# Altium PCB Soldeerstation_PCB.PcbDoc (part 2 of 2)
Units mil, origin at the board's own origin, x right, y up, seen from the top; angles counter-clockwise.
Board outline 2015.02 x 3477.09 mil, 2 copper layers (Top Layer, Bottom Layer); 67 components, 39 nets, 214 pads, 115 vias.
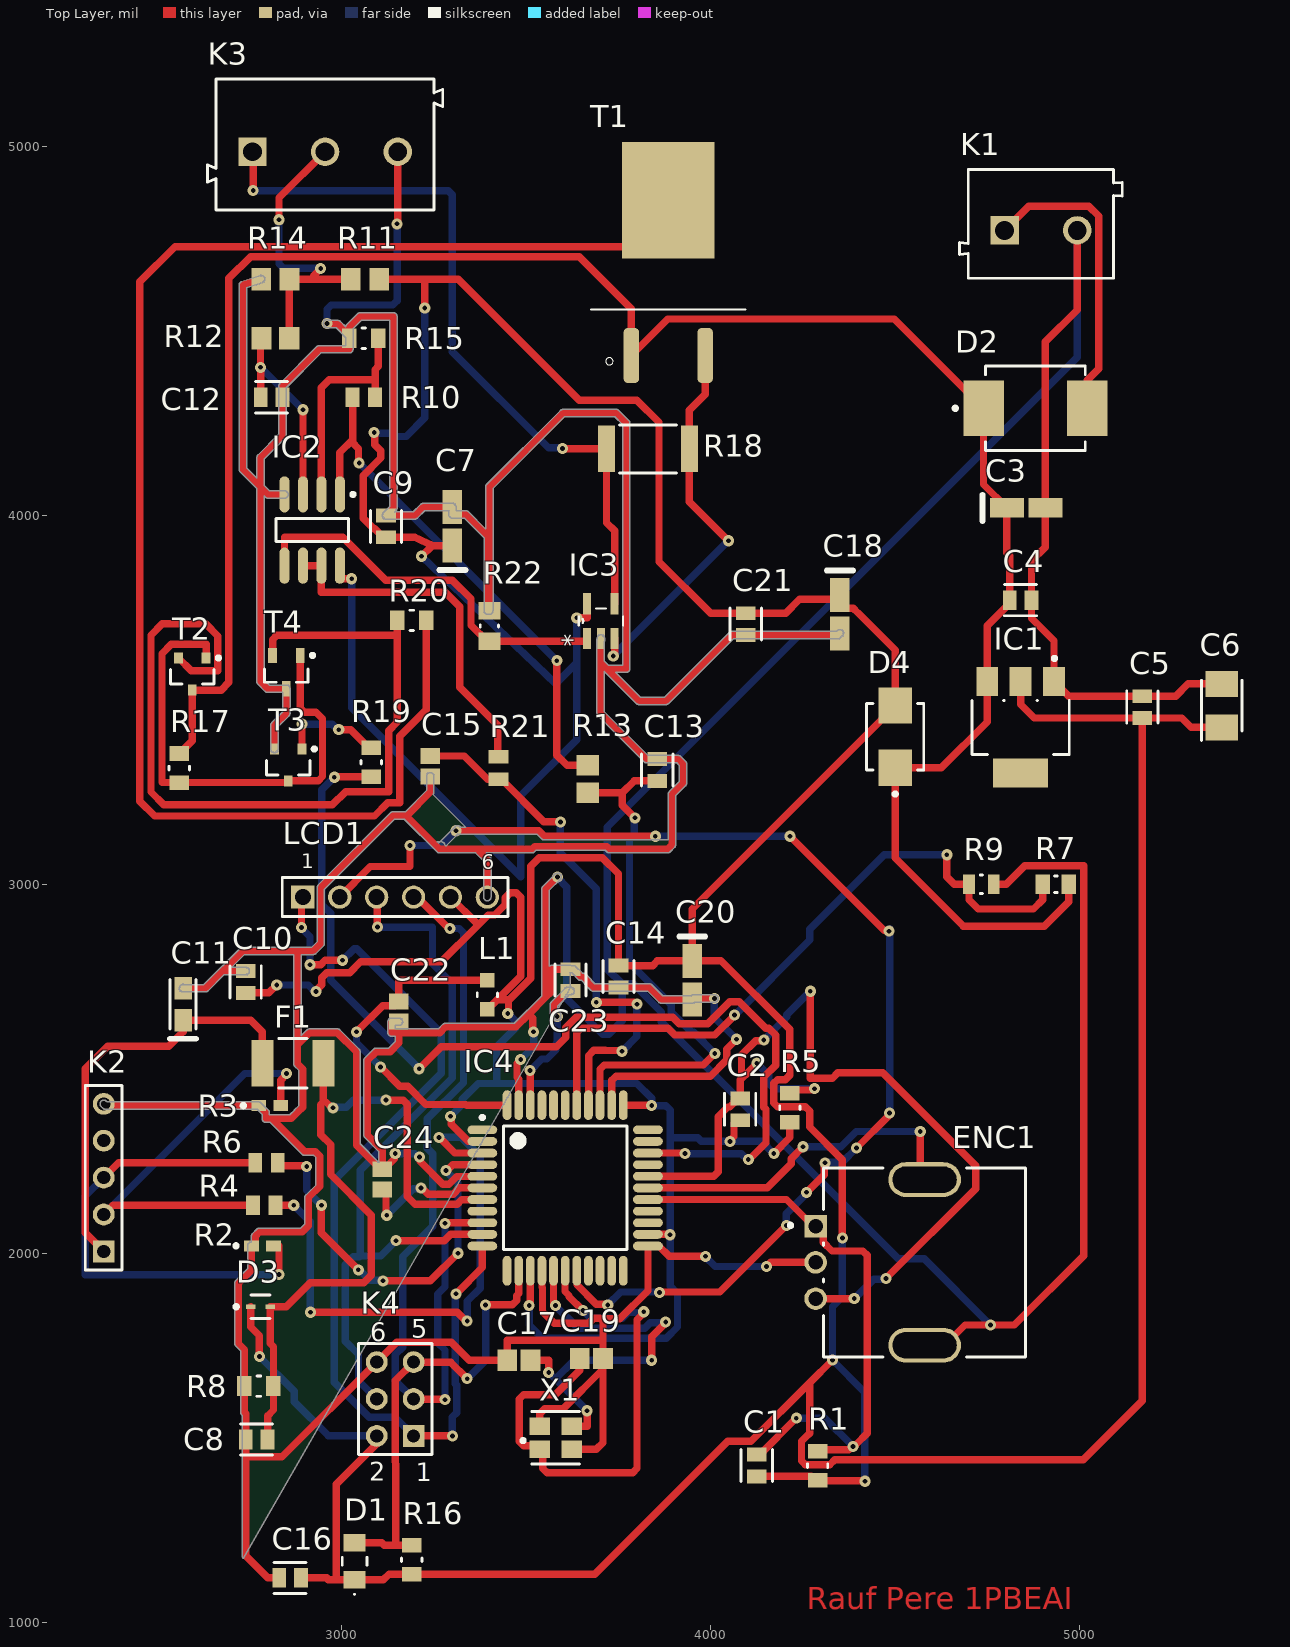
[diagram p0: Top Layer view]

## Via types
v1: diameter 30, hole 13, Top Layer to Bottom Layer, 115 vias

## Nets (pads, with @x,y where several pads share a name; then routed paths per layer and width w, separated by ;. In a path a pad name is that pad's centre, name@x,y a point inside that pad or via, vN(x,y) a via of type N, cw(c..) or ccw(c..) an arc to the next point about the centre after c; other vN are vias at no path point) (continued)
NetC8_1: (continued)
  Top Layer w20: C8.1 2799.06,1559 2815,1574.94 R8.2 2815,1747 2806.57,1755.43 D3.2 2850,1855 2915,1920 3059.5,1920 3080,1940.5 3080,2103.2 2970,2213.2 2970,2294.54 2943.12,2321.42 2943.12,2402.77 2950.36,2410 ; F1.2 2950.36,2418.09 2950.36,2410 ; v1(2976,2394) 2973.29,2394 2957.29,2410 2950.36,2410 ; v1(3120,2415) 3166.28,2415 3178,2403.28 3178,2153.72 3198.69,2133.03 3313,2133.03 3324.79,2144.82 3380.49,2144.82 IC4.7
  Bottom Layer w20: v1(2976,2394) 2977.91,2395.91 3011.91,2395.91 3031,2415 v1(3120,2415)
NetC11_1: C11.1 F1.1 K2.1 | length 1167
  Top Layer w20: K2.1 2305,2055 2305,2500 2366,2561 2531,2561 2570,2600 C11.1 2753.31,2631.69 2785,2600 F1.1
NetC12_1: C12.1 IC2.3 R12.1 | length 552.4
  Top Layer w20: R12.1@2780,4480 v1(2780,4401) 2780,4399.47 2780.47,4399 C12.1 ; IC2.3 v1(2895,4286)
  Bottom Layer w20: v1(2780,4401) v1(2895,4286)
NetC13_1: C13.1 IC4.36 R13.1 | length 1452.2
  Top Layer w20: R13.1 3760,3247.6 ; IC4.36 3700.08,2498.28 3711.79,2510 3980,2510 v1(4011.13,2541.13) ; v1(3794.5,3180) 3760,3214.5 3760,3247.6 ; C13.1 3792.4,3280 3760,3247.6
  Bottom Layer w20: v1(3794.5,3180) 3792.58,3178.09 3792.58,3137.58 3780,3125 3780,2786.92 3893.33,2673.59 3893.33,2653.82 3948.72,2598.43 3953.82,2598.43 v1(4011.13,2541.13)
NetC15_2: C15.2 IC4.37 R21.1 | length 1444.1
  Top Layer w20: C15.2 3332,3347.56 3395.07,3284.49 3432.87,3284.49 3547.59,3169.77 3591.23,3169.77 v1(3592.59,3168.41) ; IC4.37 3668.58,2430.94 3669.28,2431.63 3669.28,2535.78 3683.49,2550 3714.75,2550 3715.38,2549.37 3758.09,2549.37 v1(3760,2547.46) ; v1(3690,2680) 3792.29,2680 3797.29,2675 v1(3800,2675)
  Bottom Layer w20: v1(3592.59,3168.41) 3592.59,3085.23 3690,2987.83 v1(3690,2680) ; v1(3760,2547.46) 3800,2587.46 v1(3800,2675)
NetC17_2: C17.2 IC4.16 X1.3 | length 1142.3
  Top Layer w20: C17.2 3561,1710 v1(3561,1677) ; IC4.16 3574.09,1865.61 3579,1860.71 v1(3579,1858) ; X1.3 3665,1531.5 v1(3665,1573) ; v1(3840,1710) 3840,1773.65 3878,1811.65 v1(3878,1813.44)
  Bottom Layer w20: v1(3561,1677) 3579,1659 ; v1(3579,1858) 3640.66,1796.34 3820.93,1796.34 3836.12,1811.52 3876.09,1811.52 v1(3878,1813.44) ; v1(3665,1573) 3579,1659 ; v1(3840,1710) 3630,1710 3579,1659
NetC19_2: C19.2 IC4.17 X1.1 | length 1431.6
  Top Layer w20: IC4.17@3605.28,1915 3605.28,1896.17 3616.14,1885.31 3616.14,1882.48 v1(3653.61,1845) ; C19.2 3645,1683.19 3578.41,1616.6 3492.72,1616.6 3481,1604.89 3481,1489.85 3492.72,1478.14 3527.06,1478.14 3545,1460.2 3545,1416.72 3556.72,1405 3788.28,1405 3800.13,1416.84 3800.13,1820.17 3818.63,1838.67 v1(3818.63,1841.37)
  Bottom Layer w20: v1(3653.61,1845) 3675.27,1823.34 3760.89,1823.34 3777.01,1839.46 3816.71,1839.46 v1(3818.63,1841.37)
NetC22_2: C22.2 IC4.44 L1.2 | length 952.3
  Top Layer w20: v1(3040,2600) 3110.91,2670.91 3143.35,2670.91 C22.2 3155,2739.37 L1.2 ; v1(3105,2505) 3157.75,2452.25 3178.93,2452.25 3228.18,2403 3336.52,2403 3338.1,2401.42 IC4.44@3446.44,2401.42
  Bottom Layer w20: v1(3040,2600) 3040,2570 v1(3105,2505)
NetC23_1: C23.1 IC4.42 | length 375.8
  Top Layer w20: v1(3510,2495) 3511.1,2493.9 IC4.42 ; v1(3584.09,2641.62) 3584.09,2644.33 3575.23,2653.18 3575.23,2673.58 3612.13,2710.47 C23.1
  Bottom Layer w20: v1(3510,2495) 3510.86,2495 3542.25,2526.39 3556.39,2526.39 3580.86,2550.86 3580.86,2567.43 3584.09,2570.66 v1(3584.09,2641.62)
NetC24_2: C24.2 IC4.6 | length 378.3
  Top Layer w20: C24.2 3120.09,2162.35 3120.09,2104.91 v1(3122,2103) ; v1(3215,2177.01) 3217.71,2177.01 3234.68,2160.03 3301.82,2160.03 3318.8,2177.01 IC4.6
  Bottom Layer w20: v1(3122,2103) 3194.09,2175.09 3213.09,2175.09 v1(3215,2177.01)
NetD1_1: D1.1 IC4.13 K4.5 R16.1 | length 1231.2
  Top Layer w20: D1.1 3109,1215.39 3115.65,1208.74 3146,1208.74 ; R16.1 3146,1208.74 ; v1(3340,1660) 3295,1705 K4.5 3145,1655 3146,1208.74 ; v1(3390,1860) 3462.38,1860 3474.09,1871.72 3474.09,1885.46 3479.61,1890.97 IC4.13
  Bottom Layer w20: v1(3340,1660) 3390,1710 v1(3390,1860)
NetD2_2: D2.2 K1.1 | length 827.9
  Top Layer w20: K1.1 4862.29,4838 5025,4838 5052,4811 5052,4397 5020.49,4365.49 D2.2
NetENC1_1: ENC1.1 IC4.28 | length 945.1
  Top Layer w20: IC4.28 4153.01,2177.01 4218.36,2242.36 4218.36,2256.5 4250,2288.14 v1(4250,2288.5) ; v1(4568,2330) 4568,2211.25 ENC1.1
  Bottom Layer w20: v1(4250,2288.5) 4353.25,2288.5 4394.75,2330 v1(4568,2330)
NetIC2_1: IC2.1 R10.1 R13.2 | length 1457.4
  Top Layer w20: IC2.1 2995,4170 3029.49,4204.49 ; R10.1 3029.49,4204.49 ; v1(3047.37,4141.63) 3045.46,4143.54 3045.46,4180.66 3029.49,4196.63 3029.49,4204.49 ; v1(3583,3606) 3583,3350 3610.6,3322.4 R13.2
  Bottom Layer w20: v1(3047.37,4141.63) v1(3583,3606)
NetIC2_2: IC2.2 R10.2 R15.2 | length 607.4
  Top Layer w20: IC2.2 2945,4346 2966,4367 3090.51,4367 ; R10.2 3090.51,4367 ; R15.2 3099.37,4403.86 3090.51,4395 3090.51,4367
NetIC2_5: IC2.5 IC3.1 R22.1 | length 1062.2
  Top Layer w20: IC2.5 2845,3940 3003,3940 3119,3824 3300,3824 3350.31,3773.69 3350.31,3702.32 3394,3658.63 R22.1 3665,3658.63 IC3.1
NetIC2_6: IC2.6 IC2.7 R21.2 | length 964.5
  Top Layer w20: IC2.6 IC2.7 2945,3791.68 3280.32,3791.68 3320.31,3751.69 3320.31,3533.69 3423,3431 3423,3345.51 R21.2
NetIC3_3: IC3.3 R18.1 T1.3 | length 1053.4
  Top Layer w20: v1(3736,3619) 3739.8,3622.8 IC3.3 ; T1.3 3985,4327.76 3942.24,4285 R18.1 3942.24,4036.76 v1(4048,3931)
  Bottom Layer w20: v1(3736,3619) v1(4048,3931)
NetIC3_4: IC3.4 K3.1 R18.2 | length 2029.4
  Top Layer w20: K3.1 2760,4983.45 v1(2760,4880) ; v1@3600,4180 R18.2 3717.76,3980.04 3739.8,3958 IC3.4
  Bottom Layer w20: v1(2760,4880) 3288.28,4880 3300,4868.28 3300,4443.45 3560.54,4182.91 3596.09,4182.91 v1(3598,4181)
NetIC4_3: IC4.3 R4.2 | length 1521.6
  Top Layer w20: R4.2 v1(2870,2130) ; v1(2915,1840) 3313.29,1840 3337.29,1816 v1(3340,1816) ; v1(3264,2314) 3306.5,2271.5 IC4.3
  Bottom Layer w20: v1(2870,2130) 2915,2085 v1(2915,1840) ; v1(3264,2314) 3324.28,2314 3375,2263.28 3375,1905.5 3340,1870.5 v1(3340,1816)
NetIC4_4: IC4.4 R6.2 | length 1076.9
  Top Layer w20: R6.2 2834.62,2236.91 2903.09,2236.91 v1(2905,2235) ; v1(2945,2130) 2945,2055 v1(3045,1955) ; v1(3111.5,1925.24) 3240.24,1925.24 v1(3315,2000) ; v1(3282.35,2224) 3285.06,2224 3301.06,2240 IC4.4
  Bottom Layer w20: v1(2905,2235) 2905,2170 v1(2945,2130) ; v1(3045,1955) 3047.71,1955 3075.55,1927.16 3109.59,1927.16 v1(3111.5,1925.24) ; v1(3282.35,2224) 3315,2191.35 v1(3315,2000)
NetIC4_9: IC4.9 K4.3 LCD1.4 | length 2230.7
  Top Layer w20: LCD1.4 3205.14,2965.16 3290.29,2880 v1(3293,2880) ; K4.3 3196,1604 3279,1604 v1(3280,1603) ; v1(3280,2081.02) 3281.5,2082.52 IC4.9
  Bottom Layer w20: K4.3 3145.47,1654.53 3145.47,1725.52 3165,1745.04 3165,1991.03 3247,2073.03 3247,2269.64 3232,2284.64 3232,2364.43 3330,2462.43 3330,2869 3319,2880 v1(3293,2880) ; v1(3280,1603) 3280,1737.6 3260,1757.6 3260,1889.5 3280,1909.5 v1(3280,2081.02)
NetIC4_10: IC4.10 K4.4 LCD1.3 | length 2052.8
  Top Layer w20: LCD1.3 3095.84,2964 3095.84,2885.16 v1(3097,2884) ; v1(3147,2034) 3278.23,2034 3295.25,2051.02 IC4.10
  Bottom Layer w20: K4.4 3045.47,1654.53 3045.47,1725.52 3010,1760.99 3010,1969.5 3030.5,1990 3047.57,1990 3050,1992.43 ; v1(3097,2884) 3098,2883 3246.19,2883 3246.19,2784.28 3300,2730.47 3300,2474.85 3050,2224.85 3050,1992.43 ; v1(3147,2034) 3105.43,1992.43 3050,1992.43
NetIC4_11: IC4.11 K4.1 LCD1.1 | length 2661.4
  Top Layer w20: v1(2891,2883) 2891,2961.47 LCD1.1 ; v1(2913.91,2781.91) 2942.73,2781.91 2954.82,2794 v1(3002,2794) ; K4.1 v1(3300,1505) ; v1(3310,1890) 3381.18,1961.18 IC4.11
  Bottom Layer w20: v1(2891,2883) 2891,2880.29 2913.91,2857.38 v1(2913.91,2781.91) ; v1(3002,2794) 3033.51,2825.51 3041,2825.51 3270,2596.51 3270,2487.28 2980,2197.28 2980,1649.96 3074.49,1555.47 3144.53,1555.47 K4.1 ; v1(3300,1505) 3300,1555.98 3312,1567.98 3312,1642.75 3308,1646.75 3308,1885.29 3310,1887.29 v1(3310,1890)
NetIC4_18: IC4.18 LCD1.2 | length 3380.4
  Top Layer w20: LCD1.2 3077.53,3048 3185,3048 v1(3185,3105) ; v1(3310,3145) 3534.18,3145 3549.18,3130 v1(3850,3130) ; IC4.18 3637.78,1951.9 3637.78,1914.11 3689.98,1861.91 3719.09,1861.91 v1(3721,1860) ; v1(3861.65,1893.25) 3863.39,1895 4025,1895 v1(4205,2075) ; v1(4215,3130) 4470.25,2874.75 4480.95,2874.75 v1(4482.86,2872.83) ; v1(4260,2165) 4308.09,2213.09 4308.09,2243.09 v1(4310,2245) ; v1(4395,2285) 4485,2375 v1(4485,2380)
  Bottom Layer w20: v1(3185,3105) 3270,3105 v1(3310,3145) v1@3313.79,3148.79 ; v1(3721,1860) 3756,1895 3859.9,1895 v1(3861.65,1893.25) ; v1(3850,3130) v1(4215,3130) ; v1(4205,2075) 4205,2107 4258.09,2160.09 4258.09,2163.09 v1(4260,2165) ; v1(4310,2245) 4311.91,2246.91 4356.91,2246.91 v1(4395,2285) ; v1(4485,2380) v1@4485,2880
NetIC4_31: IC4.31 R19.1 | length 2776.9
  Top Layer w20: v1(2980,3290) 2981.26,3291.26 R19.1 ; v1(3210,2500) 3270,2560 3582.13,2560 3606.77,2584.64 3606.77,2610.71 3636.06,2640 3896.72,2640 3915.14,2621.57 3991.57,2621.57 4051.84,2681.84 4077.66,2681.84 4149.5,2610 4157.25,2610 4176,2591.25 4176,2509.57 4144.11,2477.68 4144.11,2395.99 4150,2390.1 4150,2299.17 4135.03,2284.2 4134.9,2284.2 4104.71,2254 v1(4102,2254) ; IC4.31 3928.5,2271.5 v1(3930,2270)
  Bottom Layer w20: v1(2980,3290) 2946.19,3256.19 2946.19,2945.07 2970,2921.26 2970,2740 v1(3210,2500) ; v1(3930,2270) 4083.29,2270 4099.29,2254 v1(4102,2254)
NetIC4_38: IC4.38 R7.1 R9.1 | length 1826.6
  Top Layer w20: IC4.38@3636.77,2440 3636.77,2598.28 3648.49,2610 3884.29,2610 3902.71,2591.57 4011.07,2591.57 v1(4064.75,2645.25) ; v1(4640,3080) 4640,3020 4660,3000 R9.1 4700,2958 4725,2933 4875,2933 4900,2958 R7.1
  Bottom Layer w20: v1(4064.75,2645.25) 4268.33,2848.83 4268.33,2878.33 4470,3080 v1(4640,3080)
NetK2_2: K2.2 R3.2 R4.1 | length 1161.4
  Top Layer w20: K2.2 2380,2130 R4.1 ; R3.2 2834.84,2469.14 2850,2484.29 v1(2850,2487)
  Bottom Layer w20: K2.2 2737,2487 v1(2850,2487)
NetK2_3: K2.3 R2.2 R6.1 | length 1328.8
  Top Layer w20: K2.3 2395,2245 R6.1 ; R2.2 2830,2020 v1(2830,1942)
  Bottom Layer w20: K2.3 2305,2155 2305,1942 v1(2830,1942)
NetK3_2: K3.2 R11.1 R12.2 R14.2 | length 828.5
  Top Layer w20: v1@2830,4810 2830,4860.32 K3.2 ; R12.2 2857.89,4480.49 2857.89,4639.51 R14.2 2924,4640 ; v1(2943,4669) 2924,4650 2924,4640 ; R11.1 2924,4640
  Bottom Layer w20: v1(2830,4801) 2830,4681.72 2842.72,4669 v1(2943,4669)
NetR17_1: R17.1 T2.1 T3.3 T4.1 | length 1331.8
  Top Layer w20: T2.1 2632.4,3650 2538,3650 2513,3625 2513,3275.63 R17.1 2855,3275.63 T3.3 2936,3280 2948,3292 2948,3448.28 2930.28,3466 2899.12,3466 2887.4,3477.72 T4.1
NetR19_2: R19.2 T3.1 | length 282.1
  Top Layer w20: v1(2892,3434) 2892.2,3433.8 2892.2,3366.82 T3.1 ; v1(2992,3419) 3024.11,3419 3073.11,3370 R19.2
  Bottom Layer w20: v1(2892,3434) 2974.29,3434 2989.29,3419 v1(2992,3419)
NetR20_1: R20.1 T2.2 T4.2 | length 2381.2
  Top Layer w20: T2.2 2592.36,3578.54 2664.21,3578.54 2664.21,3672.79 2631,3706 2514,3706 2483,3675 2483,3250 2518,3215 2974.47,3215 3010.47,3251 3127,3251 3127,3416 3150.63,3439.63 3150.63,3675 ; T4.2 2812.6,3663.28 2824.31,3675 3150.63,3675 ; R20.1 3150.63,3675
NetR20_2: R20.2 T1.2 | length 4264.7
  Top Layer w20: R20.2 3229.37,3473.37 3157,3401 3157,3221 3125,3221 3089,3185 2493,3185 2453,3225 2453,4633 2548,4728 3885,4728 T1.2
VCC: C3.1 C4.1 D2.1 D4.1 IC1.3 R7.2 R17.2 T1.1 T2.3 | length 5858.7
  Top Layer w20: R17.2 2595,3389.37 T2.3@2595,3526 ; T2.3 T2.3@2595,3526 ; R7.2 4970.87,2953 4903.87,2886 4685,2886 4500,3071 D4.1 4625,3315.35 4749.45,3439.8 IC1.3 4749.45,3700.98 4810.47,3762 C4.1 4810.47,3891 4802.83,3898.64 C3.1 4739.51,4083.33 D2.1 4497.51,4532 3883.97,4532 T1.1 3785,4560 3644,4701 2753,4701 2694.21,4642.21 2694.21,3546.97 2673.24,3526 T2.3@2595,3526
pads on no net: IC1.4 IC4.1 IC4.8 IC4.12 IC4.19 IC4.20 IC4.21 IC4.22 IC4.25 IC4.26 IC4.30 IC4.32 IC4.33 IC4.39 IC4.40 IC4.41 K2.4

## Polygon pours and split planes (outlines as drawn)
no net on bordoutline (solid): 2220,1005 2225,1010 2225,5385 5595,5385 5600,5390 5602.5,5387.5 5602.5,1007.5

## Other copper
Top Layer:
  text "Rauf Pere 1PBEAI" at 4260,1035 h60

## Silkscreen, mask and mechanical layers (free items; w line width, h text height)
bordoutline:
  lines w10: 2215,5375 2235,5395 5605,5395 5605,1010 5600,1005 2220,1005 2215,1010 2215,5010 2215,5005 2215,5380
bordoutline2:
  lines w10: 2215,1000 2220,1005 2220,5390 5595,5390 5610,5375 5610,1000 2215,1000

## Text inside footprints (layer, text, board x,y; h text height)
IC3: Top 3D Body "*" at 3648,3643.5 h50 r90; Top Overlay "*" at 3648,3643.5 h50 r90
K4: Top Overlay "1" at 3200,1382 h50; Top Overlay "2" at 3074,1383 h50; Top Overlay "5" at 3188,1771 h50; Top Overlay "6" at 3078,1762 h50
LCD1: Top Overlay "1" at 2890,3043 h40; Top Overlay "6" at 3379,3041 h40